# EAGLE board EXT_TWI_LVC (EAGLE 6.5.0)
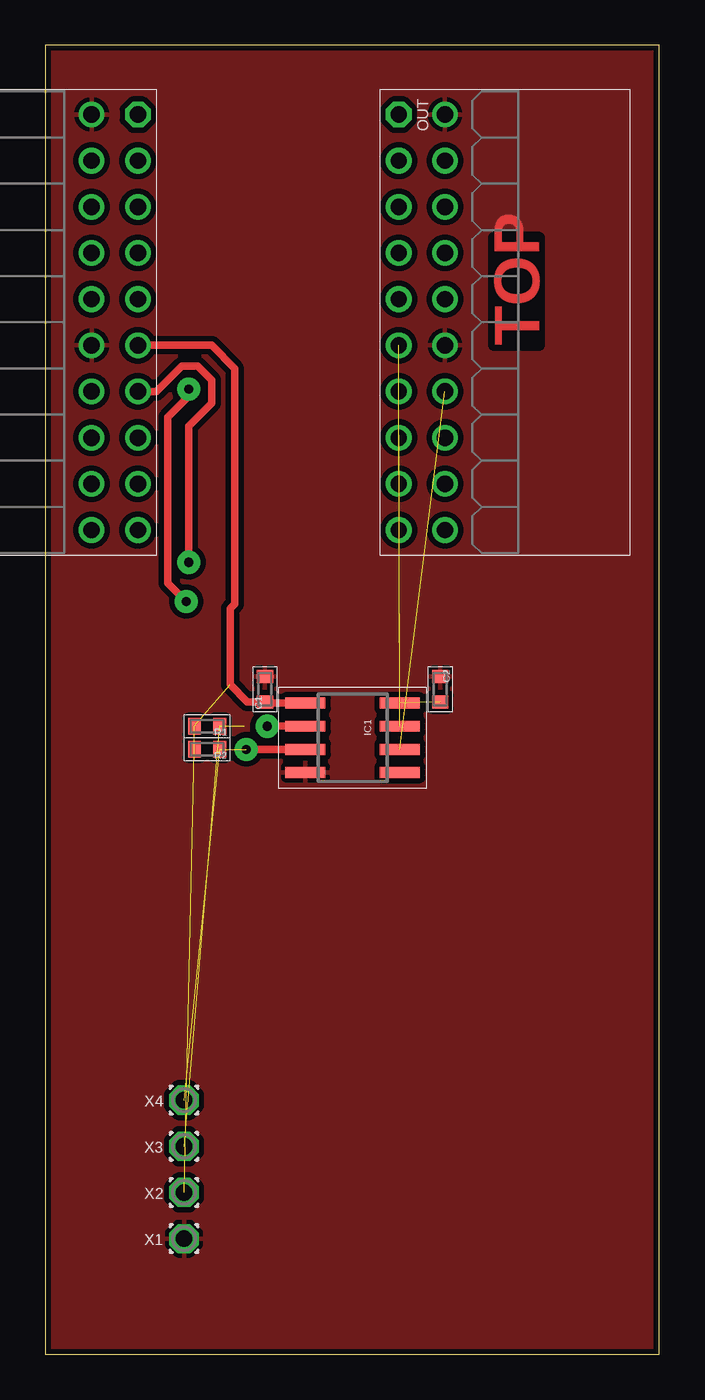
[diagram p0: board, top side]
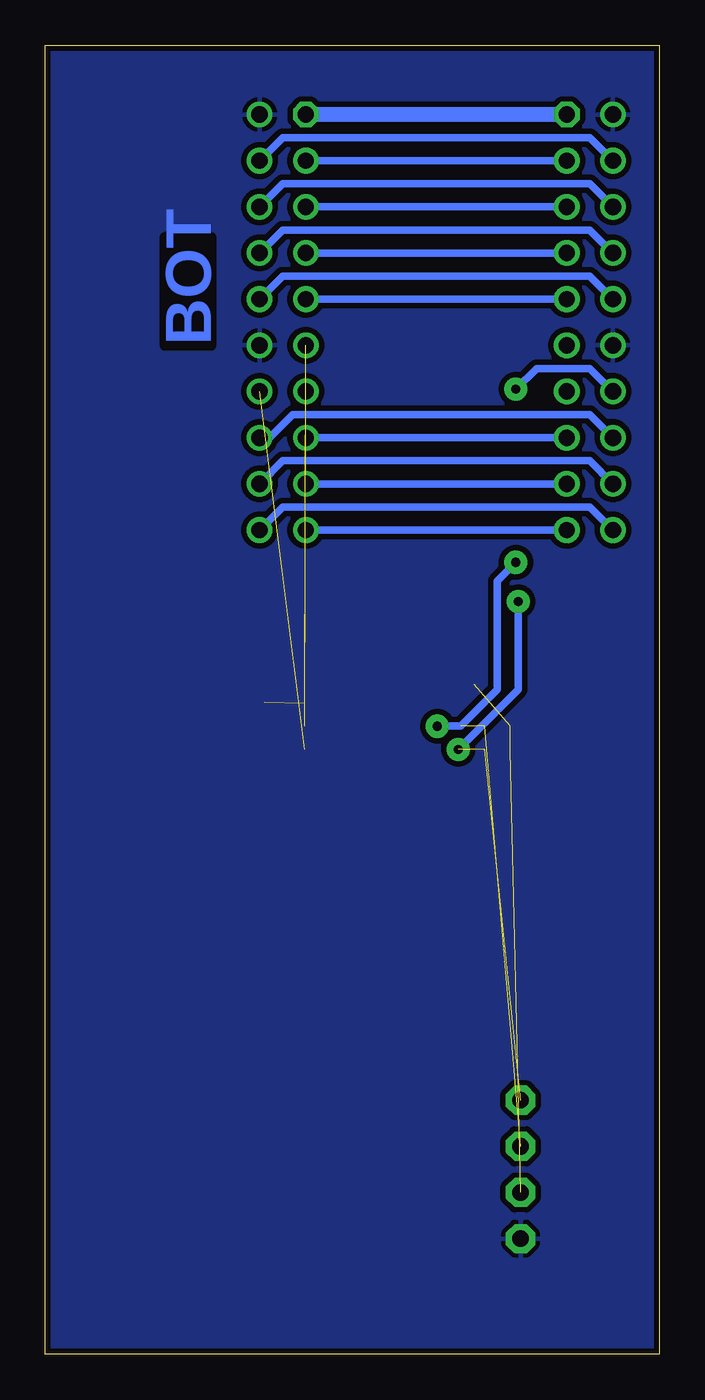
[diagram p1: board, bottom side, seen from below]

Size 33.75 x 72 mm. Coordinates in mm from the lower left corner, seen from the top.
Outline: 0,0 33.75,0 33.75,72 0,72 0,0
Copper layers (1*16): Top 0.035mm / dielectric 1.5mm / Bottom 0.035mm
Design rules "default *": minimum track width 10mil, minimum drill 10mil, track to track 12mil, track to pad 12mil, pad to pad 12mil, via to via 12mil, smd to smd 12mil, copper to edge 12mil, drill to drill 8mil, minimum pad ring 10mil, minimum via ring 8mil, stop-mask expansion 4mil, vias tented up to drill 0mil, thermal gap 10mil
tKeepout: area 0,0 to 33.8,2; area 0,70 to 33.8,72

## Footprints (pad centres in the part's own frame; a part is rotated, then mirrored left to right if it is on the bottom)
0603 = smd 0.7 x 0.9: 1 -0.697,0; 2 0.697,0
SOIC8 = smd 0.6 x 2.2: 1 -1.905,-2.6; 2 -0.635,-2.6; 3 0.635,-2.6; 4 1.905,-2.6; 5 1.905,2.6; 6 0.635,2.6; 7 -0.635,2.6; 8 -1.905,2.6
FE10-2WS = drill 0.9 octagon: P$1 -11.43,1.27 | drill 0.9: P$2 -11.43,-1.27; P$3 -8.89,1.27; P$4 -8.89,-1.27; P$5 -6.35,1.27; P$6 -6.35,-1.27; P$7 -3.81,1.27; P$8 -3.81,-1.27; P$9 -1.27,1.27; P$10 -1.27,-1.27; P$11 1.27,1.27; P$12 1.27,-1.27; P$13 3.81,1.27; P$14 3.81,-1.27; P$15 6.35,1.27; P$16 6.35,-1.27; P$17 8.89,1.27; P$18 8.89,-1.27; P$19 11.43,1.27; P$20 11.43,-1.27
ML20LS = drill 0.9 octagon: P$1 -11.43,-1.27 | drill 0.9: P$2 -11.43,1.27; P$3 -8.89,-1.27; P$4 -8.89,1.27; P$5 -6.35,-1.27; P$6 -6.35,1.27; P$7 -3.81,-1.27; P$8 -3.81,1.27; P$9 -1.27,-1.27; P$10 -1.27,1.27; P$11 1.27,-1.27; P$12 1.27,1.27; P$13 3.81,-1.27; P$14 3.81,1.27; P$15 6.35,-1.27; P$16 6.35,1.27; P$17 8.89,-1.27; P$18 8.89,1.27; P$19 11.43,-1.27; P$20 11.43,1.27
T1.6/0.9 = drill 0.914 pad 1.6 octagon: 1 0,0

## Placement (x,y rotation side)
C1  100n  [0603]  12.06,36.58 90 top
C2  100n  [0603]  21.72,36.58 270 top
IC1  [SOIC8]  16.89,33.91 270 top
IN  EF20  [FE10-2WS]  3.81,56.77 270 top
OUT  MF20  [ML20LS]  20.7,56.77 270 top
R1  [0603]  8.89,34.54 180 top
R2  [0603]  8.89,33.27 180 top
X1  [T1.6/0.9]  7.62,6.35 180 top
X2  [T1.6/0.9]  7.62,8.89 180 top
X3  [T1.6/0.9]  7.62,11.43 180 top
X4  [T1.6/0.9]  7.62,13.97 180 top

## Library data of the parts
C1 C2 R1 R2 = RCL
IC1 = Other
IN OUT X1-X4 = Conn

## Nets
GND: C1.2 C2.1 IC1.4 IN.P$2 IN.P$12 OUT.P$2 OUT.P$12 X1.1
N$1: IN.P$20 OUT.P$20
N$3: IN.P$19 OUT.P$19
N$4: C2.2 IC1.8 OUT.P$11
PC0: IN.P$18 OUT.P$18
PC1: IN.P$17 OUT.P$17
PC2: IN.P$16 OUT.P$16
PC3: IN.P$15 OUT.P$15
PD0: IN.P$10 OUT.P$10
PD1: IN.P$9 OUT.P$9
PD2: IN.P$8 OUT.P$8
PD3: IN.P$7 OUT.P$7
PD4: IN.P$6 OUT.P$6
PD5: IN.P$5 OUT.P$5
PD6: IN.P$4 OUT.P$4
PD7: IN.P$3 OUT.P$3
SCLA: IC1.2 IN.P$13 R1.1 X3.1
SCLB: IC1.7 OUT.P$13
SDAA: IC1.3 IN.P$14 R2.1 X4.1
SDAB: IC1.6 OUT.P$14
VCCA: C1.1 IC1.1 IN.P$11 R1.2 R2.2 X2.1
VIN: IN.P$1 OUT.P$1

## Tracks (layer width: path | path; a pad name or v marks a point on that pad's centre or on a via)
GND
  pour Bottom: 0,0.13 33.66,0.13 33.66,71.88 0,71.88
  pour Top: 0,0 33.66,0 33.66,71.88 0,71.88
N$1
  Bottom 0.406: IN.P$20 3.81,46.61 20.7,46.61 OUT.P$20
N$3
  Bottom 0.406: IN.P$19 OUT.P$19
N$4  (2 unrouted)
PC0
  Bottom 0.406: IN.P$18 3.81,49.15 20.7,49.15 OUT.P$18
PC1
  Bottom 0.406: IN.P$17 OUT.P$17
PC2
  Bottom 0.406: OUT.P$16 21.41,50.42 20.14,51.69 3.81,51.69 IN.P$16
PC3
  Bottom 0.406: IN.P$15 OUT.P$15
PD0
  Bottom 0.406: IN.P$10 3.81,59.31 20.7,59.31 OUT.P$10
PD1
  Bottom 0.406: IN.P$9 OUT.P$9
PD2
  Bottom 0.406: IN.P$8 3.81,61.85 20.7,61.85 OUT.P$8
PD3
  Bottom 0.406: IN.P$7 OUT.P$7
PD4
  Bottom 0.406: IN.P$6 3.81,64.39 20.7,64.39 OUT.P$6
PD5
  Bottom 0.406: IN.P$5 OUT.P$5
PD6
  Bottom 0.406: IN.P$4 3.81,66.93 20.7,66.93 OUT.P$4
PD7
  Bottom 0.406: IN.P$3 OUT.P$3
SCLA  (via drill 0.5 pad 1.27)  (2 unrouted)
  Top 0.406: IC1.2 v12.19,34.54 | IN.P$13 6.1,52.96 7.49,54.36 8.38,54.36 9.14,53.59 9.14,52.32 7.87,51.05 v7.87,43.56
  Bottom 0.406: v7.87,43.56 8.89,42.55 8.89,36.58 10.92,34.54 v12.19,34.54
SCLB  (1 unrouted)
SDAA  (via drill 0.5 pad 1.27)  (2 unrouted)
  Top 0.406: v7.87,53.09 7.87,52.7 6.73,51.56 6.73,42.42 v7.75,41.4 | v11.05,33.27 IC1.3
  Bottom 0.406: IN.P$14 3.81,54.23 6.73,54.23 v7.87,53.09 | v7.75,41.4 7.75,36.58 v11.05,33.27
SDAB  (1 unrouted)
VCCA  (3 unrouted)
  Top 0.406: IN.P$11 9.14,55.5 10.41,54.23 10.41,41.27 10.16,41.02 10.16,36.83 11.11,35.88 C1.1 12.13,35.81 IC1.1
VIN
  Bottom 0.813: IN.P$1 OUT.P$1

## Text on the board
Top: TOP
Bottom: BOT